# Allegro board dsb-r1.brd
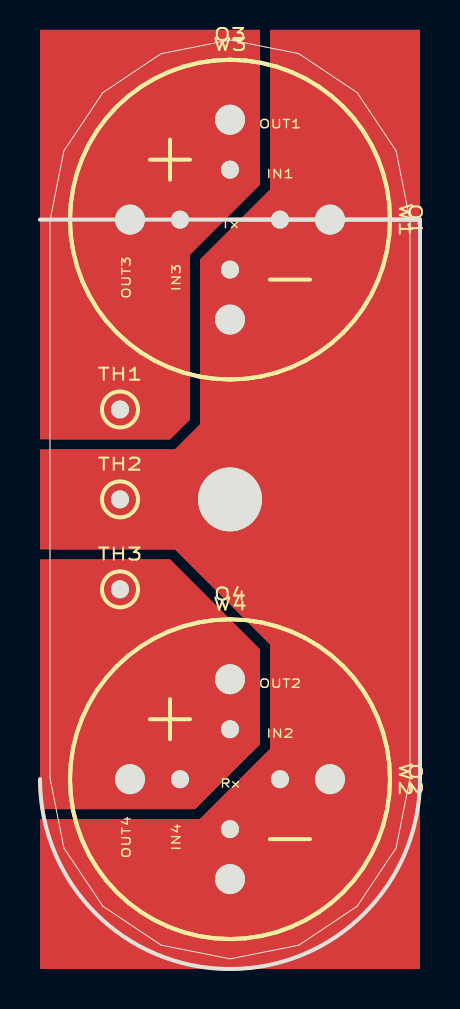
[diagram p0: board, top side]
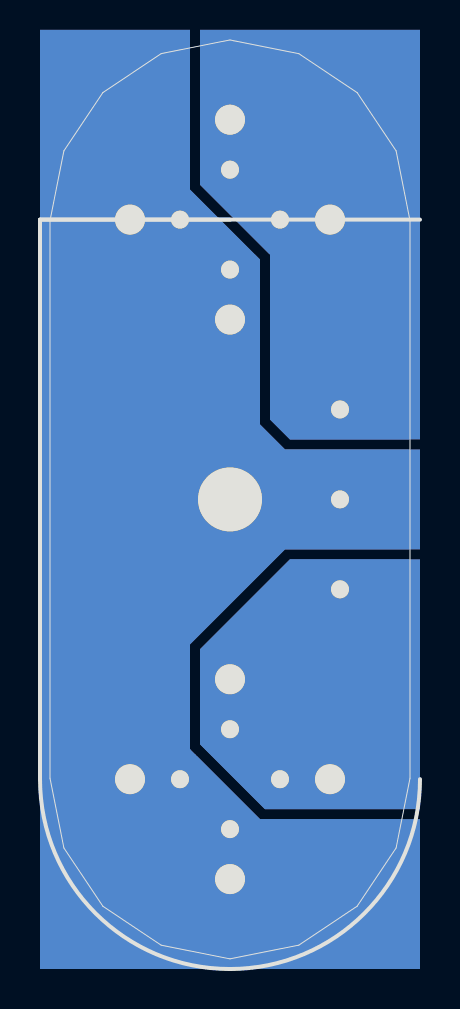
[diagram p1: board, bottom side, seen from below]

Outline 19 x 46.49 mm; copper layers: TOP, BOTTOM. Coordinates in mm from the lower left corner of the outline.
Outline path: 9.5,37.5 19,37.5 ; 19,37.5 0,37.5 ; 19,37.5 19,9.5 arc(9.5,0) 0,9.5 ; 0.5,37.45 1.19,40.94 3.14,43.86 6.06,45.81 9.5,46.49 12.94,45.81 15.86,43.86 17.81,40.94 18.5,37.45 18.5,9.55 17.81,6.06 15.86,3.14 12.94,1.19 9.5,0.51 6.06,1.19 3.14,3.14 1.19,6.06 0.5,9.55 0.5,37.45

## Placement (name value [footprint] x y rotation side)
H1  -  [HOLE3_2]  9.5 23.5 0 top
NOREF  -  []  0 0 0 top
O1  -  [ZT40_ZR40]  9.5 37.5 270 top
O2  -  [ZT40_ZR40]  9.5 9.5 270 top
O3  -  [ZT40_ZR40]  9.5 37.5 0 top
O4  -  [ZT40_ZR40]  9.5 9.5 0 top
TH1  -  [TP0_9]  4 28 0 top
TH2  -  [TP0_9]  4 23.5 0 top
TH3  -  [TP0_9]  4 19 0 top
W1  -  [US14_4_01A]  9.5 37.5 270 top
W2  -  [US14_4_01A]  9.5 9.5 270 top
W3  -  [US14_4_01A]  9.5 37.5 0 top
W4  -  [US14_4_01A]  9.5 9.5 0 top

## Library data of the parts
H1 = PCB_HOLE: alternate symbols: (B:HOLE3_2_ALT)
O1 O3 = ZT40: alternate symbols: (B:ZT40_ZR40_ALT)
O2 O4 = ZR40R: alternate symbols: (B:ZT40_ZR40_ALT)
TH1-TH3 = B+: alternate symbols: (B:TP0_9_ALT)
W1-W4 = US14_4_01A: alternate symbols: (B:US14_4_01A_ALT)

## Footprints (pads in the part's own frame, mm; a bottom-side part is the same pattern mirrored in y, then rotated)
HOLE3_2
  round 5.5 hole 3.2: 1(0,0)
TP0_9
  round 1.3 hole 0.9: 1(0,0)
US14_4_01A
  rect 1.3x1.3 hole 0.9: 1(-2.5,0)
  round 1.3 hole 0.9: 2(2.5,0)
ZT40_ZR40
  rect 1.9x1.9 hole 1.5: 1(-5,0)
  round 1.9 hole 1.5: 2(5,0)

## Nets
GND: H1.1 O1.2 O2.2 O3.2 O4.2 TH2.1 W1.2 W2.2 W3.2 W4.2
RX_PLS: O2.1 O4.1 TH3.1 W2.1 W4.1
TX_PLS: O1.1 O3.1 TH1.1 W1.1 W3.1

## Routing (per net, layer and track width the routed paths; a pad name or vN(x,y) marks a point on that pad's centre or on a via; arc(x,y) is an arc through that point)
GND: length 85.2
  TOP w0.5: W4.2 12.74,8.76 ; W4.2 12.74,10.24 ; W4.2 11.26,8.76 ; W4.2 11.26,10.24 ; W3.2 11.26,38.24 ; W3.2 12.74,38.24 ; W3.2 11.26,36.76 ; W3.2 12.74,36.76 ; O1.2 8.55,33.45 ; O1.2 8.55,31.55 ; O1.2 10.45,33.45 ; O1.2 10.45,31.55 ; O4.2 13.55,8.55 ; O4.2 15.45,8.55 ; O4.2 13.55,10.45 ; O4.2 15.45,10.45 ; O3.2 15.45,38.45 ; O3.2 13.55,36.55 ; O3.2 13.55,38.45 ; O3.2 15.45,36.55 ; TH2.1 4,22.45 ; TH2.1 4,24.55 ; TH2.1 5.05,23.5 ; TH2.1 2.95,23.5 ; O2.2 10.45,5.45 ; O2.2 10.45,3.55 ; O2.2 8.55,5.45 ; O2.2 8.55,3.55 ; W2.2 8.76,7.74 ; W2.2 8.76,6.26 ; W2.2 10.24,7.74 ; W2.2 10.24,6.26 ; W1.2 10.24,35.74 ; W1.2 8.76,34.26 ; W1.2 10.24,34.26 ; W1.2 8.76,35.74
  BOTTOM w0.5: TH2.1 4,22.45 ; TH2.1 4,24.55 ; TH2.1 5.05,23.5 ; TH2.1 2.95,23.5 ; W3.2 11.26,36.76 ; W3.2 11.26,38.24 ; W3.2 12.74,36.76 ; W3.2 12.74,38.24 ; O4.2 13.55,8.55 ; O4.2 15.45,8.55 ; O4.2 15.45,10.45 ; O4.2 13.55,10.45 ; O2.2 8.55,3.55 ; O2.2 10.45,5.45 ; O2.2 10.45,3.55 ; O2.2 8.55,5.45 ; O1.2 10.45,33.45 ; O1.2 10.45,31.55 ; O1.2 8.55,33.45 ; O1.2 8.55,31.55 ; W1.2 10.24,34.26 ; W1.2 8.76,35.74 ; W1.2 10.24,35.74 ; W1.2 8.76,34.26 ; O3.2 13.55,38.45 ; O3.2 15.45,36.55 ; O3.2 13.55,36.55 ; O3.2 15.45,38.45 ; W4.2 12.74,8.76 ; W4.2 11.26,10.24 ; W4.2 11.26,8.76 ; W4.2 12.74,10.24 ; W2.2 10.24,7.74 ; W2.2 8.76,6.26 ; W2.2 8.76,7.74 ; W2.2 10.24,6.26
RX_PLS: length 41.8
  TOP w0.5: W2.1 8.45,12 ; W2.1 10.55,12 ; W2.1 9.5,10.95 ; W2.1 O2.1 ; O4.1 W4.1 ; O4.1 3.15,9.5 ; O4.1 4.5,10.85 ; W4.1 8.05,9.5 ; W4.1 7,8.45 ; W4.1 7,10.55 ; TH3.1 5.05,19 ; TH3.1 2.95,19 ; TH3.1 4,20.05 ; TH3.1 4,17.95 ; O2.1 8.15,14.5 ; O2.1 9.5,15.85
  BOTTOM w0.5: TH3.1 4,20.05 ; TH3.1 5.05,19 ; TH3.1 2.95,19 ; TH3.1 4,17.95 ; O2.1 8.15,14.5 ; O2.1 9.5,15.85 ; O2.1 W2.1 ; W4.1 8.05,9.5 ; W4.1 7,8.45 ; W4.1 O4.1 ; W4.1 7,10.55 ; W2.1 9.5,10.95 ; W2.1 8.45,12 ; W2.1 10.55,12 ; O4.1 4.5,10.85 ; O4.1 3.15,9.5
TX_PLS: length 44.5
  TOP w0.5: TH1.1 5.05,28 ; TH1.1 4,26.95 ; TH1.1 2.95,28 ; TH1.1 4,29.05 ; O1.1 8.15,42.5 ; O1.1 W1.1 ; O1.1 9.5,43.85 ; W1.1 8.45,40 ; W1.1 9.5,38.95 ; W1.1 10.55,40 ; W3.1 7,38.55 ; W3.1 8.05,37.5 ; W3.1 7,36.45 ; W3.1 O3.1 ; O3.1 4.5,38.85 ; O3.1 3.15,37.5 ; O3.1 4.5,36.15
  BOTTOM w0.5: W1.1 O1.1 ; W1.1 10.55,40 ; W1.1 8.45,40 ; W1.1 9.5,38.95 ; O1.1 9.5,43.85 ; O1.1 8.15,42.5 ; W3.1 8.05,37.5 ; W3.1 7,36.45 ; W3.1 7,38.55 ; W3.1 O3.1 ; TH1.1 2.95,28 ; TH1.1 4,29.05 ; TH1.1 5.05,28 ; TH1.1 4,26.95 ; O3.1 4.5,36.15 ; O3.1 3.15,37.5 ; O3.1 4.5,38.85

## Copper pours and planes (outline as drawn; the poured copper is in the pictures)
GND on TOP (solid shape): 19,0 0,0 0,7.5 8,7.5 11.5,11 11.5,16.25 6.75,21 0,21 0,26 6.75,26 8,27.25 8,35.5 11.5,39 11.5,47 19,47
GND on TOP (solid shape): 11.65,46.06 12.91,45.81 12.94,45.81 12.97,45.79 15.09,44.37 15.1,44.37 15.12,44.35 15.82,43.88 15.83,43.88 15.88,43.83 15.88,43.82 17.79,40.97 17.81,40.94 17.81,40.91 18.19,39 18.49,37.49 18.5,37.48 18.5,9.52 18.49,9.51 18.39,8.98 17.81,6.09 17.81,6.06 17.79,6.03 15.88,3.18 15.88,3.17 15.83,3.12 15.82,3.12 12.97,1.21 12.94,1.19 12.91,1.19 9.55,0.52 9.54,0.51 9.46,0.51 9.45,0.52 6.09,1.19 6.06,1.19 6.03,1.21 3.18,3.12 3.17,3.12 3.12,3.17 3.12,3.18 1.89,5.02 8.25,5.02 8.25,3.98 8.98,3.25 10.02,3.25 10.75,3.98 10.75,5.02 10.02,5.75 8.98,5.75 8.25,5.02 1.89,5.02 1.21,6.03 1.19,6.06 1.19,6.09 0.94,7.35 0.93,7.36 0.93,7.39 8.55,7.39 8.55,6.61 9.11,6.05 9.89,6.05 10.45,6.61 10.45,7.39 9.89,7.95 9.11,7.95 8.55,7.39 0.93,7.39 0.93,7.44 0.99,7.5 8,7.5 10.39,9.89 11.05,9.89 11.05,9.11 11.61,8.55 12.39,8.55 12.95,9.11 12.95,9.89 12.83,10.02 13.25,10.02 13.25,8.98 13.98,8.25 15.02,8.25 15.75,8.98 15.75,10.02 15.02,10.75 13.98,10.75 13.25,10.02 12.83,10.02 12.39,10.45 11.61,10.45 11.05,9.89 10.39,9.89 11.5,11 11.5,16.25 6.75,21 0.56,21 0.5,21.06 0.5,23.89 3.05,23.89 3.05,23.11 3.61,22.55 4.39,22.55 4.95,23.11 4.95,23.89 4.39,24.45 3.61,24.45 3.05,23.89 0.5,23.89 0.5,25.94 0.56,26 6.75,26 8,27.25 8,33.02 8.25,33.02 8.25,31.98 8.98,31.25 10.02,31.25 10.75,31.98 10.75,33.02 10.02,33.75 8.98,33.75 8.25,33.02 8,33.02 8,35.39 8.55,35.39 8.55,34.61 9.11,34.05 9.89,34.05 10.45,34.61 10.45,35.39 9.89,35.95 9.11,35.95 8.55,35.39 8,35.39 8,35.5 10.39,37.89 11.05,37.89 11.05,37.11 11.61,36.55 12.39,36.55 12.95,37.11 12.95,37.89 12.83,38.02 13.25,38.02 13.25,36.98 13.98,36.25 15.02,36.25 15.75,36.98 15.75,38.02 15.02,38.75 13.98,38.75 13.25,38.02 12.83,38.02 12.39,38.45 11.61,38.45 11.05,37.89 10.39,37.89 11.5,39 11.5,46.01 11.56,46.07 11.64,46.07
GND on BOTTOM (solid shape): 19,0 0,0 0,7.5 8,7.5 11.5,11 11.5,16.25 6.75,21 0,21 0,26 6.75,26 8,27.25 8,35.5 11.5,39 11.5,47 19,47
GND on BOTTOM (solid shape): 11.65,46.06 12.91,45.81 12.94,45.81 12.97,45.79 15.09,44.37 15.1,44.37 15.12,44.35 15.82,43.88 15.83,43.88 15.88,43.83 15.88,43.82 17.79,40.97 17.81,40.94 17.81,40.91 18.19,39 18.49,37.49 18.5,37.48 18.5,9.52 18.49,9.51 18.39,8.98 17.81,6.09 17.81,6.06 17.79,6.03 15.88,3.18 15.88,3.17 15.83,3.12 15.82,3.12 12.97,1.21 12.94,1.19 12.91,1.19 9.55,0.52 9.54,0.51 9.46,0.51 9.45,0.52 6.09,1.19 6.06,1.19 6.03,1.21 3.18,3.12 3.17,3.12 3.12,3.17 3.12,3.18 1.89,5.02 8.25,5.02 8.25,3.98 8.98,3.25 10.02,3.25 10.75,3.98 10.75,5.02 10.02,5.75 8.98,5.75 8.25,5.02 1.89,5.02 1.21,6.03 1.19,6.06 1.19,6.09 0.94,7.35 0.93,7.36 0.93,7.39 8.55,7.39 8.55,6.61 9.11,6.05 9.89,6.05 10.45,6.61 10.45,7.39 9.89,7.95 9.11,7.95 8.55,7.39 0.93,7.39 0.93,7.44 0.99,7.5 8,7.5 10.39,9.89 11.05,9.89 11.05,9.11 11.61,8.55 12.39,8.55 12.95,9.11 12.95,9.89 12.83,10.02 13.25,10.02 13.25,8.98 13.98,8.25 15.02,8.25 15.75,8.98 15.75,10.02 15.02,10.75 13.98,10.75 13.25,10.02 12.83,10.02 12.39,10.45 11.61,10.45 11.05,9.89 10.39,9.89 11.5,11 11.5,16.25 6.75,21 0.56,21 0.5,21.06 0.5,23.89 3.05,23.89 3.05,23.11 3.61,22.55 4.39,22.55 4.95,23.11 4.95,23.89 4.39,24.45 3.61,24.45 3.05,23.89 0.5,23.89 0.5,25.94 0.56,26 6.75,26 8,27.25 8,33.02 8.25,33.02 8.25,31.98 8.98,31.25 10.02,31.25 10.75,31.98 10.75,33.02 10.02,33.75 8.98,33.75 8.25,33.02 8,33.02 8,35.39 8.55,35.39 8.55,34.61 9.11,34.05 9.89,34.05 10.45,34.61 10.45,35.39 9.89,35.95 9.11,35.95 8.55,35.39 8,35.39 8,35.5 10.39,37.89 11.05,37.89 11.05,37.11 11.61,36.55 12.39,36.55 12.95,37.11 12.95,37.89 12.83,38.02 13.25,38.02 13.25,36.98 13.98,36.25 15.02,36.25 15.75,36.98 15.75,38.02 15.02,38.75 13.98,38.75 13.25,38.02 12.83,38.02 12.39,38.45 11.61,38.45 11.05,37.89 10.39,37.89 11.5,39 11.5,46.01 11.56,46.07 11.64,46.07
RX_PLS on TOP (solid shape): 11,16 11,11.25 7.75,8 0,8 0,20.5 6.5,20.5
RX_PLS on TOP (solid shape): 11,16 11,11.25 7.75,8 0.85,8 0.79,8.06 0.79,8.09 0.76,8.25 5.75,8.25 5.75,8.55 7.95,8.55 7.95,10.45 6.05,10.45 6.05,8.55 5.75,8.55 5.75,10.75 3.25,10.75 3.25,8.25 0.76,8.25 0.51,9.51 0.5,9.52 0.5,11.05 10.45,11.05 10.45,12.95 8.55,12.95 8.55,11.05 0.5,11.05 0.5,13.25 10.75,13.25 10.75,15.75 8.25,15.75 8.25,13.25 0.5,13.25 0.5,19.39 3.05,19.39 3.05,18.61 3.61,18.05 4.39,18.05 4.95,18.61 4.95,19.39 4.39,19.95 3.61,19.95 3.05,19.39 0.5,19.39 0.5,20.44 0.56,20.5 6.5,20.5
RX_PLS on BOTTOM (solid shape): 11,16 11,11.25 7.75,8 0,8 0,20.5 6.5,20.5
RX_PLS on BOTTOM (solid shape): 11,16 11,11.25 7.75,8 0.85,8 0.79,8.06 0.79,8.09 0.76,8.25 5.75,8.25 5.75,8.55 7.95,8.55 7.95,10.45 6.05,10.45 6.05,8.55 5.75,8.55 5.75,10.75 3.25,10.75 3.25,8.25 0.76,8.25 0.51,9.51 0.5,9.52 0.5,11.05 10.45,11.05 10.45,12.95 8.55,12.95 8.55,11.05 0.5,11.05 0.5,13.25 10.75,13.25 10.75,15.75 8.25,15.75 8.25,13.25 0.5,13.25 0.5,19.39 3.05,19.39 3.05,18.61 3.61,18.05 4.39,18.05 4.95,18.61 4.95,19.39 4.39,19.95 3.61,19.95 3.05,19.39 0.5,19.39 0.5,20.44 0.56,20.5 6.5,20.5
TX_PLS on TOP (solid shape): 11,39.25 7.5,35.75 7.5,27.5 6.5,26.5 0,26.5 0,47 11,47
TX_PLS on TOP (solid shape): 9.55,46.48 10.75,46.24 10.91,46.21 10.94,46.21 11,46.15 11,39.25 7.5,35.75 7.5,27.5 6.5,26.5 0.56,26.5 0.5,26.56 0.5,28.39 3.05,28.39 3.05,27.61 3.61,27.05 4.39,27.05 4.95,27.61 4.95,28.39 4.39,28.95 3.61,28.95 3.05,28.39 0.5,28.39 0.5,36.25 5.75,36.25 5.75,36.55 7.95,36.55 7.95,38.45 6.05,38.45 6.05,36.55 5.75,36.55 5.75,38.75 3.25,38.75 3.25,36.25 0.5,36.25 0.5,37.48 0.51,37.49 0.82,39.05 10.45,39.05 10.45,40.95 8.55,40.95 8.55,39.05 0.82,39.05 1.19,40.91 1.19,40.94 1.21,40.97 1.4,41.25 10.75,41.25 10.75,43.75 8.25,43.75 8.25,41.25 1.4,41.25 3.12,43.82 3.12,43.83 3.17,43.88 3.18,43.88 6.03,45.79 6.06,45.81 6.09,45.81 8,46.19 8.01,46.2 8.04,46.2 9.45,46.48 9.46,46.49 9.54,46.49
TX_PLS on BOTTOM (solid shape): 11,39.25 7.5,35.75 7.5,27.5 6.5,26.5 0,26.5 0,47 11,47
TX_PLS on BOTTOM (solid shape): 9.55,46.48 10.75,46.24 10.91,46.21 10.94,46.21 11,46.15 11,39.25 7.5,35.75 7.5,27.5 6.5,26.5 0.56,26.5 0.5,26.56 0.5,28.39 3.05,28.39 3.05,27.61 3.61,27.05 4.39,27.05 4.95,27.61 4.95,28.39 4.39,28.95 3.61,28.95 3.05,28.39 0.5,28.39 0.5,36.25 5.75,36.25 5.75,36.55 7.95,36.55 7.95,38.45 6.05,38.45 6.05,36.55 5.75,36.55 5.75,38.75 3.25,38.75 3.25,36.25 0.5,36.25 0.5,37.48 0.51,37.49 0.82,39.05 10.45,39.05 10.45,40.95 8.55,40.95 8.55,39.05 0.82,39.05 1.19,40.91 1.19,40.94 1.21,40.97 1.4,41.25 10.75,41.25 10.75,43.75 8.25,43.75 8.25,41.25 1.4,41.25 3.12,43.82 3.12,43.83 3.17,43.88 3.18,43.88 6.03,45.79 6.06,45.81 6.09,45.81 8,46.19 8.01,46.2 8.04,46.2 9.45,46.48 9.46,46.49 9.54,46.49

## Text on the board
Ref Des/Silkscreen Top: Tx | Rx | OUT1 | IN1 | OUT2 | IN2 | OUT3 | OUT4 | IN3 | IN4
User.22: LAYER_1 | LAYER_2 | SILK_1 | MASK_1 | COMP_SIDE | SOLD_SIDE | MASK_2 | SILK_2 | 2LAYER STACKUP | Layers | T | OZ | PCB Layer | PCB Thickness | Copper Thickness | Material Type | 02 | 1.6 | X.X | FR-4 | PCB Specification
